# Altium PCB LoRaPIC1.PcbDoc
Units mm, origin at the board's own origin, x right, y up, seen from the top; angles counter-clockwise.
Board outline 57.15 x 38.23 mm, 2 copper layers (Top Layer, Bottom Layer); 22 components, 29 nets, 104 pads, 75 vias.
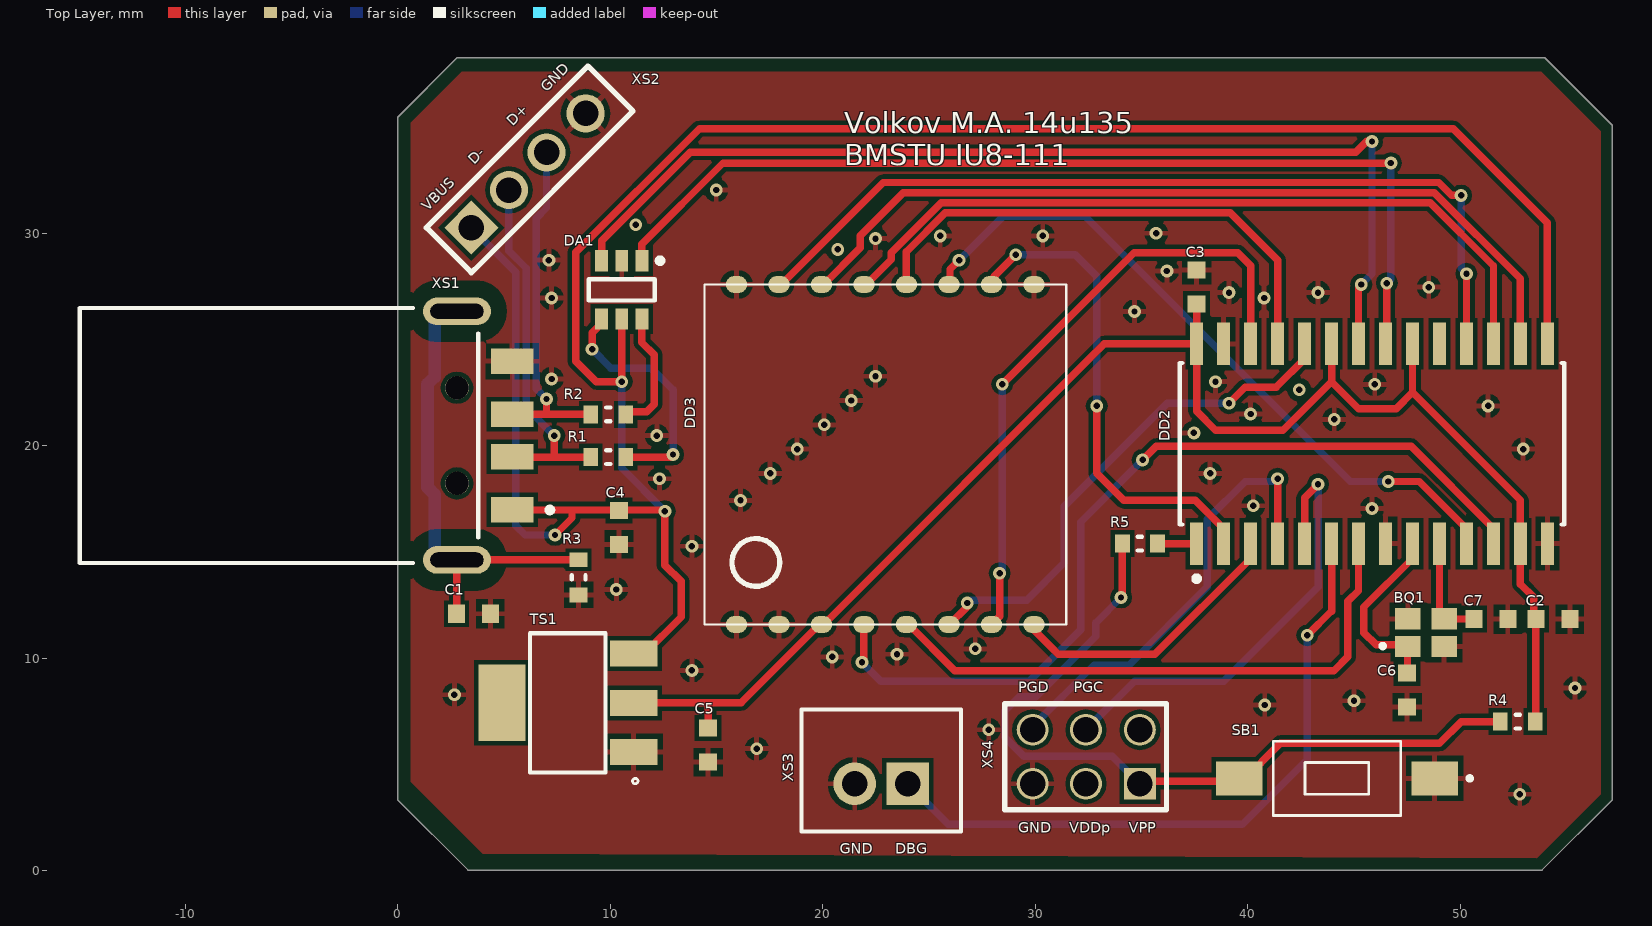
[diagram p0: Top Layer view]
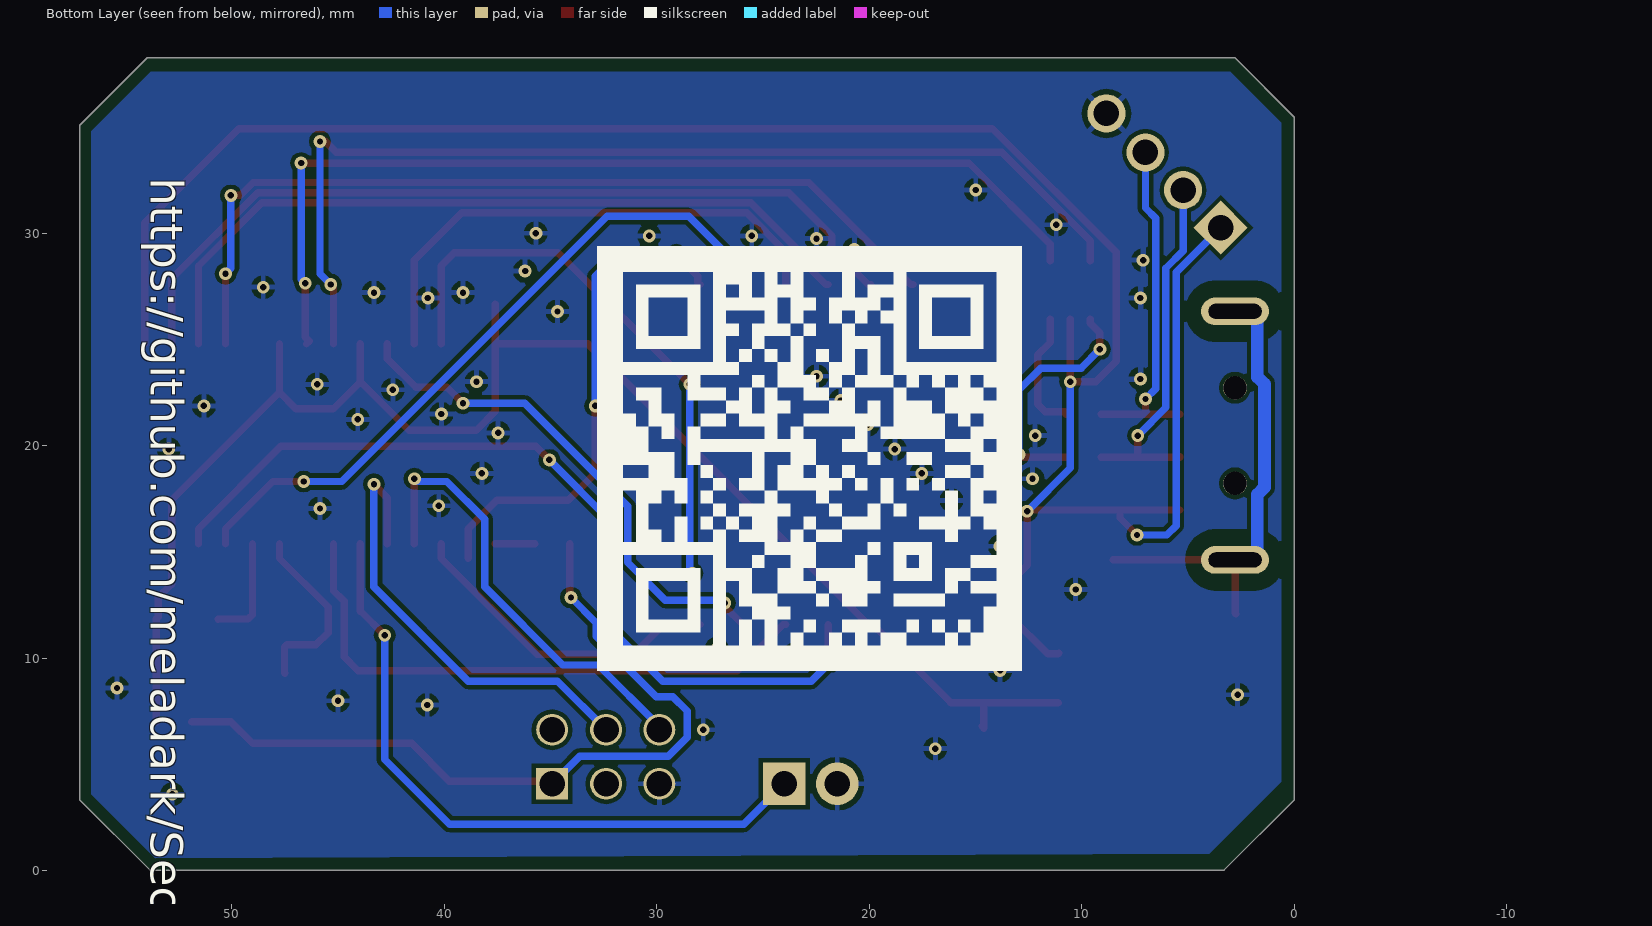
[diagram p1: Bottom Layer view, seen from below]
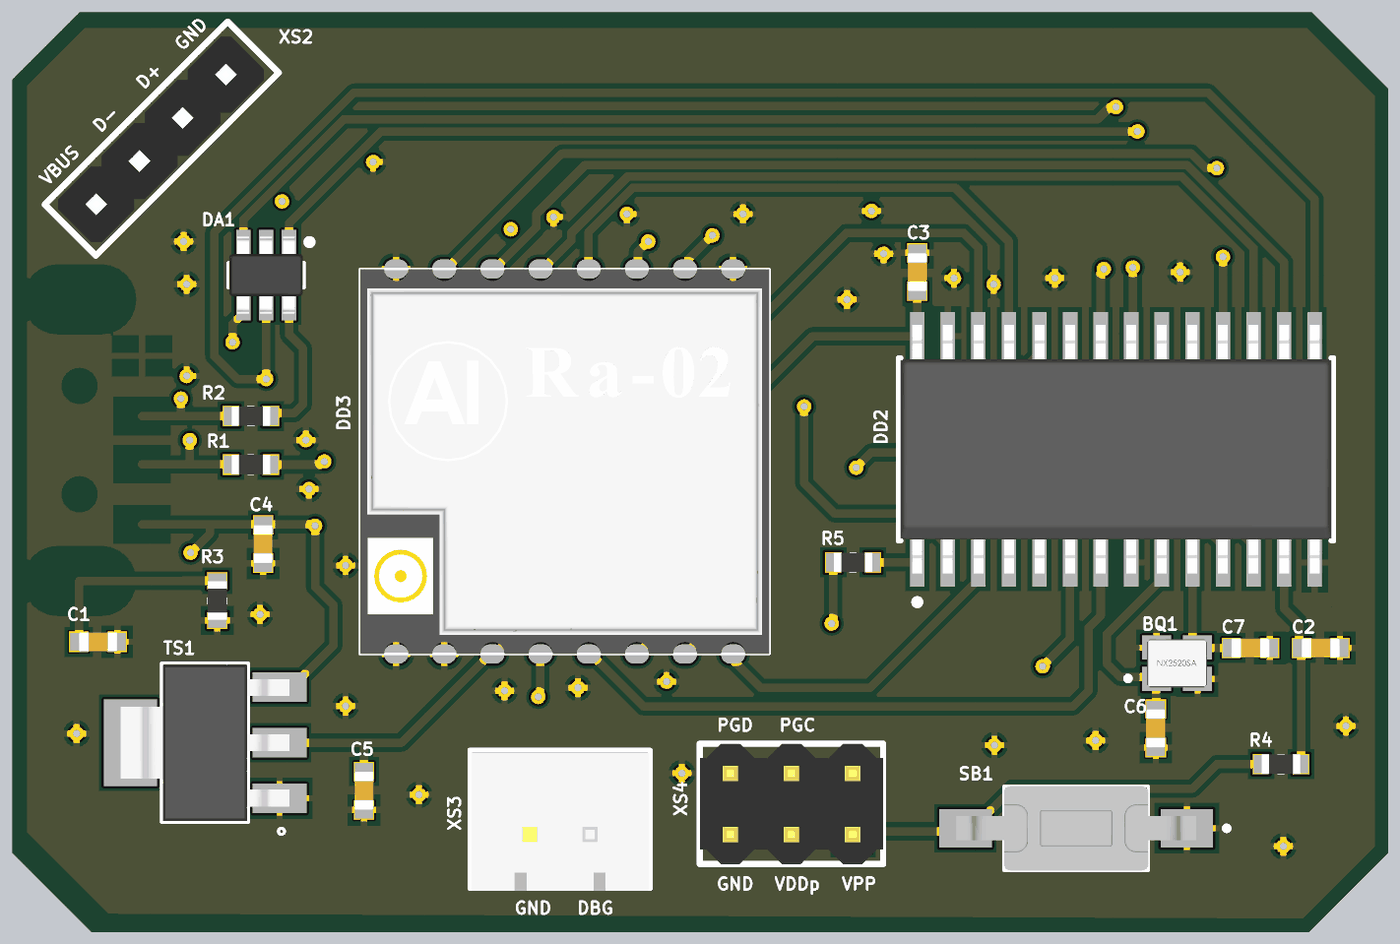
[diagram p2: 3D render of the assembled board from above, using the file's embedded part models]

## Layer stack, top to bottom
Top Solder: solder mask 0.0102, Solder Resist, Dk 3.5
Top Layer: signal copper 0.0356
Dielectric 1: dielectric 0.32, FR-4, Dk 4.8
Bottom Layer: signal copper 0.0356
Bottom Solder: solder mask 0.0102, Solder Resist, Dk 3.5

## Board outline
0,3.332 0,35.463 2.794,38.257 53.975,38.257 57.15,35.082 57.15,3.332 53.848,0.03 3.302,0.03

## Design rules (kind name [scope] priority, off if disabled: settings)
Clearance [All] p1: gap=0.2 ignorepadtopadclearanceinfootprint=FALSE except(0.125: Arc-Arc Arc-Track Arc-SMDPad Arc-THPad Arc-Via Arc-Text Track-Track Track-SMDPad Track-THPad Track-Via Track-Text SMDPad-SMDPad SMDPad-THPad SMDPad-Via SMDPad-Text THPad-THPad THPad-Via THPad-Text Via-Via Via-Text Text-Text; 2: Fill-Text Poly-Text Region-Text)
PolygonConnect [All] p1: connectstyle=Relief reliefconductorwidth=0.254 reliefentries=4 polygonreliefangle="90 Angle" airgapwidth=0.254
RoutingCorners [All] p1: cornerstyle=45-Degree minsetback=3 maxsetback=3
RoutingVias [All] p1: holewidth=0.3 width=0.7 viastyle="Through Hole" minholewidth=0.3 minwidth=0.6 maxholewidth=0.6 maxwidth=1.2
SolderMaskExpansion [All] p1: expansion=0.102
Width [All] p1: maxlimit=10 minlimit=0.125 preferedwidth=0.2
29 further rules are at their usual default settings.

## Components (designator, comment, footprint, x,y, rotation, side; value= is the part's Value field where it differs from the comment)
BQ1 "NX2520SA" *XTAL_NX2520SA-24.000000MHZ-B8 48.387,11.206 r0 top
C1 "GRM1887U1H472JA01D" CAPC1608X09L 3.556,12.095 r180 top value=4.7n
C2 "GRM188R71H104KA93D" CAPC1608X09L 54.356,11.841 r0 top
C3 "GRM188R71H104KA93D" CAPC1608X09L 37.592,27.462 r90 top
C4 "GRM188R71H104KA93D" CAPC1608X09L 10.414,16.159 r270 top
C5 "GRM188R61E106MA73D" CAPC1608X09L 14.605,5.91 r90 top
C6 "GRM1885C1H510JA01D" CAPC1608X09L 47.498,8.501 r270 top
C7 "GRM1885C2A150JA01D" CAPC1608X09L 51.435,11.841 r0 top
DA1 "USBLC6-2SC6" SOT95P280X145-6N 10.541,27.335 r270 top
DD2 "PIC24FJ128GB202-I-SO" Microchip_SO-28_0 45.847,20.096 r90 top
DD3 "RA-02 SX1278" RA-02 14.439,11.589 r90 top
R1 "RC0603FR-0768RL" RESC1608X05N 9.906,19.461 r180 top value=22
R2 "RC0603FR-0768RL" RESC1608X05N 9.906,21.477 r180 top value=22
R3 "RC0603FR-0710KL" RESC1608X05N 8.509,13.81 r270 top value=10МОм
R4 "RC0603FR-0710KL" RESC1608X05N 52.705,7.015 r180 top value=10кОм
R5 "100 ом до 470" RESC1608X05N 34.925,15.397 r180 top value="100 Ом"
SB1 "1437566-3 (FSMSM)" *SW_1437566-4 44.196,4.348 r180 top
TS1 "LD1117S33CTR" *SOT223 8.001,7.904 r180 top
XS1 "Conn_Molex_0480372200_eec" Molex_0480372200_0 -5.588,20.477 r270 top
XS2 "PBS-4" PBS-4 3.464,30.264 r45 top
XS3 "DS1066-02M(MW-2M)" B2B-XH-A 22.753,4.094 r0 top
XS4 "DS1021-2x3S" DS1021-2x3S 36.175,2.864 r90 top

## Footprints (in the part's own frame and the unit in brackets; to place one, negate y for a bottom-side part, rotate by r counter-clockwise, add the part's x,y. Pads: shape width x height; smd on the part's side, far side on the other; paste and mask are expansions set on the pad)
*SOT223 [mil]
  rect 88x48 smd: 1(-122,91) 2(-122,0) 3(-122,-91)
  rect 86.61x141.73 smd: 4(122.01,0)
  silkscreen extent -130,-129 70,150, body extent -138,-128 138,128, height 67
*SW_1437566-4 [mm]
  rect 2.18x1.6 smd: 1(-4.6,0) 2(4.6,0)
  silkscreen extent -6.35,-1.75 3,1.75, body extent -4.98,-1.75 4.98,1.75, height 4.4
*XTAL_NX2520SA-24.000000MHZ-B8 [mm]
  rect 1.2x1 smd: 1(-0.85,-0.65) 2(0.85,-0.65) 3(0.85,0.65) 4(-0.85,0.65)
  silkscreen extent -2.09,-0.68 -1.99,-0.58, body extent -1.25,-1 1.25,1, height 0.65
B2B-XH-A [mm] "2 pin connector"
  rect 2x2 hole 1.2 mask+0.07: 1(1.25,0)
  round 2 hole 1.2 mask+0.07: 2(-1.25,0)
  silkscreen extent -3.75,-2.25 3.75,3.5, body extent -3.7,-2.35 3.7,3.39, height 7.11
CAPC1608X09L [mm] "Chip Capacitor, 2-Leads, Body 1.60x0.80mm, IPC High Density"
  rect 0.8x0.85 smd paste-0.05 mask+0.07: 1(-0.8,0) 2(0.8,0)
  body extent -0.8,-0.4 0.8,0.4, height 0.9
DS1021-2x3S [mm]
  rect 1.5x1.5 hole 1.2: 1(1.23,1.25)
  round 1.5 hole 1.2: 2(1.23,3.79) 3(1.23,6.3) 4(3.77,6.3) 5(3.77,3.79) 6(3.77,1.25)
  silkscreen extent 0,0 5,7.62, body extent 0,0 5,7.62, height 8.4
Microchip_SO-28_0 [mm]
  rect 2x0.6 smd paste+0 mask+0: 1(-4.7,8.255) 2(-4.7,6.985) 3(-4.7,5.715) 4(-4.7,4.445) 5(-4.7,3.175) 6(-4.7,1.905) 7(-4.7,0.635) 8(-4.7,-0.635) 9(-4.7,-1.905) 10(-4.7,-3.175) 11(-4.7,-4.445) 12(-4.7,-5.715) 13(-4.7,-6.985) 14(-4.7,-8.255) 15(4.7,-8.255) 16(4.7,-6.985) 17(4.7,-5.715) 18(4.7,-4.445) 19(4.7,-3.175) 20(4.7,-1.905) 21(4.7,-0.635) 22(4.7,0.635) 23(4.7,1.905) 24(4.7,3.175) 25(4.7,4.445) 26(4.7,5.715) 27(4.7,6.985) 28(4.7,8.255)
  silkscreen extent -6.47,-9.05 3.8,9.05, body extent -5.8,-9.3 5.8,9.3, height 0.25
Molex_0480372200_0 [mm]
  rect 1.2x2 smd paste+0 mask+0: 1(3.5,10.975) 2(1,10.975) 3(-1,10.975) 4(-3.5,10.975)
  oval 1.3x3.2 hole 2.5 slot 0.7 at 0 deg paste-1000 mask+0: 5(-5.85,8.375) 6(5.85,8.375)
  round 1.1 hole 1.1 unplated paste-1000 mask+0: ""(-2.25,8.375) ""(2.25,8.375)
  silkscreen extent -6,-9.38 6,12.88, body extent -6.02,-9.32 6.03,11.63, height 2.11
PBS-4 [mm]
  rect 1.8x1.8 hole 1.2: 1(0,0)
  round 1.8 hole 1.2: 2(2.5,0) 3(5,0) 4(7.6,0)
  silkscreen extent -1.5,-1.5 9.25,1.5, body extent -1.25,-1.27 8.91,1.27, height 8.6
RA-02 [mm]
  oval 0.8x1 smd: 1(0,-1.5) 2(0,-3.5) 3(0,-5.5) 4(0,-7.493) 5(0,-9.5) 6(0,-11.5) 7(0,-13.5) 8(0,-15.5) 9(16,-15.5) 10(16,-13.5) 11(16,-11.5) 12(16,-9.5) 13(16,-7.5) 14(16,-5.5) 15(16,-3.5) 16(16,-1.5)
  silkscreen extent 0,-17.02 16,0, body extent 0,-17.01 16,-0.01, height 3.2
RESC1608X05N [mm] "Chip Resistor, 2-Leads, Body 1.60x0.80mm, IPC Medium Density"
  rect 0.7x0.85 smd paste-0.05: 1(-0.825,0) 2(0.825,0)
  silkscreen extent -0.1,-0.33 0.1,0.33, body extent -0.8,-0.4 0.8,0.4, height 0.45
SOT95P280X145-6N [mm] "SOT23, 6-Leads, Body 2.92x2.80mm, Pitch 0.95mm, IPC Medium Density"
  rect 1x0.6 smd: 1(-1.375,0.95) 2(-1.375,0) 3(-1.375,-0.95) 4(1.375,-0.95) 5(1.375,0) 6(1.375,0.95)
  silkscreen extent -1.5,-1.55 0.5,1.93, body extent -1.6,-1.53 1.6,1.53, height 1.45

## Part data
BQ1: library part NX2520SA-24.000000MHZ-B8, "CRYSTAL 24.0000MHZ 10PF SMD", Package="SMD-4 NDK America, Inc.", Availability=Unavailable, MF="NDK America, Inc.", MP=NX2520SA-24.000000MHZ-B8, Price=None, SnapEDA_Link=https://www.snapeda.com/parts/NX2520SA-24.000000MHZ-B8/NDK%20America%2C%20Inc./view-part/?ref=snap
C1 C2 C3 C4 C5 C6: library part CC1608, "Конденсатор 1.6x0.8 мм", Tolerance=±10%, ComponentLink1Description=buy, ТКЕ=X7R
  C1: ComponentLink1URL=https://www.chipdip.ru/product/grm1887u1h472ja01d, РКД Наименование="CC1608M - NP0 - 16 V - 4.7 nF ±10%"
  C2: ComponentLink1URL=https://www.chipdip.ru/product/grm188r71h104khttps://www.chipdip.ru/product/grm188r71h104k, GRM21BR71C105KA01L=0.1u, РКД Наименование="CC1608M - NP0 - 16 V - 10 nF ±10%"
  C3: ComponentLink1URL=https://www.chipdip.ru/product/grm188r71h104k, GRM21BR71C105KA01L=0.1u, РКД Наименование="CC1608M - NP0 - 16 V - 10 nF ±10%"
  C4: ComponentLink1URL=https://www.chipdip.ru/product/grm188r71h104k, GRM21BR71C105KA01L=100n, РКД Наименование="CC1608M - NP0 - 16 V - 10 nF ±10%"
  C5: ComponentLink1URL=https://www.chipdip.ru/product/grm188r61e106m, GRM21BR71C105KA01L=10u, РКД Наименование="CC1608M - NP0 - 16 V - 10 nF ±10%"
  C6: ComponentLink1URL=https://www.chipdip.ru/product/grm1885c1h510j, GRM21BR71C105KA01L=50p, РКД Наименование="CC1608M - NP0 - 16 V - 10 nF ±10%"
C7: library part CC1608, "Конденсатор 0.8x0.5 мм 50 пикофара", Tolerance=±10%, ComponentLink1Description=buy, ComponentLink1URL=https://www.chipdip.ru/product/grm1885c2a150j, GRM21BR71C105KA01L=15p, РКД Наименование="CC1608M - NP0 - 16 V - 10 nF ±10%", ТКЕ=X7R
DA1: "USB protection IC", Breakdown Voltage=6V, Capacitance=3.5pF, Case/Package=SOT-23, Clamping Voltage=17V, Leakage Current=150nA, Manufacturer=STMicroelectronics, Max Operating Temperature=125°C, Min Operating Temperature=-40°C, Operating Supply Voltage=1.1V, Package Quantity=3000, Peak Pulse Current=5A, Power Line Protection=Yes, Reverse Standoff Voltage=5.25V, Supplier Part Number 1=497-5235-1-ND, Test Current=1mA, Working Voltage=5V, ComponentLink1Description=http://www.farnell.com/datasheets/1690354.pdf, ComponentLink1URL=http://www.farnell.com/datasheets/1690354.pdf, ComponentLink2Description=http://www.st.com/content/ccc/resource/technical/document/datasheet/06/1d/48/9c/6c/20/4a/b2/CD00050750.pdf/files/CD00050750.pdf/jcr:content/translations/en.CD00050750.pdf, ComponentLink2URL=http://www.st.com/content/ccc/resource/technical/document/datasheet/06/1d/48/9c/6c/20/4a/b2/CD00050750.pdf/files/CD00050750.pdf/jcr:content/translations/en.CD00050750.pdf, ComponentLink3Description=http://www.st.com/web/en/resource/technical/document/datasheet/CD00050750.pdf, ComponentLink3URL=http://www.st.com/web/en/resource/technical/document/datasheet/CD00050750.pdf, ComponentLink4Description=http://datasheet.iiic.cc/stmicroelectronics/USBLC6-2SC6.pdf, ComponentLink4URL=http://datasheet.iiic.cc/stmicroelectronics/USBLC6-2SC6.pdf, ComponentLink5Description=http://www.produktinfo.conrad.com/datenblaetter/1100000-1199999/001184109-da-01-en-IC_ESD_PROTECTI_USBLC6_2SC6_SOT_23_6_STM.pdf, ComponentLink5URL=http://www.produktinfo.conrad.com/datenblaetter/1100000-1199999/001184109-da-01-en-IC_ESD_PROTECTI_USBLC6_2SC6_SOT_23_6_STM.pdf, Contact Plating=Matte,Tin, Data Rate=480Mbps, Depth=1.75mm, Direction=Bidirectional,Unidirectional, Element Configuration=Dual, ESD Protection=Yes, Height=1.3mm, Lead Free="Lead Free", Length=3.05mm, Manufacturer Part Number=USBLC6-2SC6, Max Breakdown Voltage=6V, Max Reverse Leakage Current=150nA, Min Breakdown Voltage=6V, Mount="Surface Mount", Number of Bidirectional Channels=2, Number of Channels=2, Number of Elements=1, Number of Pins=6, Packaging="Tape and Reel", PartNo=USBLC6-2SC6, Polarity=Bidirectional,Unidirectional, Pricing 1="1=0.49, 10=0.419, 100=0.3131, 500=0.24602, 1000=0.1901 (USD)", Radiation Hardening=No, REACH SVHC="No SVHC", Reverse Breakdown Voltage=6V, Stock 1=165611, Supplier 1=Digi-Key, Termination=SMD/SMT, Width=1.75mm
DD3: library part RA-02
R1 R2: library part R1608, "Резистор 1.6x0.8 мм", Tolerance=±1%, ComponentLink1Description=buy, ComponentLink1URL=https://www.chipdip.ru/product0/9000079612, РКД Наименование="RC1608M - 22 Ohm ±1%"
R3 R4 R5: library part R1608, "Резистор 1.6x0.8 мм", Tolerance=±5%, РКД Наименование="RC1608M - 100 Ohm ±5%"
  R3 R4: ComponentLink1Description=https://www.chipdip.ru/product0/9000079736, ComponentLink1URL=https://www.chipdip.ru/product0/9000079736
  R5: ComponentLink1Description=https://www.chipdip.ru/product0/9000079616, ComponentLink1URL=https://www.chipdip.ru/product0/9000079616
SB1: library part FSMSM, "1437566-3 (FSMSM), Кнопка тактовая h=4.6 мм SMD SPST Switch Tactile / Switch Tactile OFF (ON) SPST Rectangular Button Gull Wing 0.05A 24VDC SMD Loose", ComponentLink1Description=buy, ComponentLink1URL=https://www.chipdip.ru/product/tyco-1437566-3-fsmsm, ComponentLink2Description=datasheet, ComponentLink2URL=https://static.chipdip.ru/lib/071/DOC000071159.pdf, Артикул="1437566-3 (FSMSM)", Произвдитель="TE Connectivity"
TS1: "Linear Regulator / LDO Regulator Pos 3.3V 1.3A 4-Pin(3+Tab) SOT-223 T/R", Code_IPC=SOT-223, ComponentLink1Description=buy, ComponentLink1URL=https://www.chipdip.ru/product/ld1117s33ctr-2, ComponentLink2Description=datasheet, ComponentLink2URL=https://static.chipdip.ru/lib/292/DOC000292513.pdf, DatasheetVersion="revB, Feb-2007", PackageDescription="3-Lead Plastic Small Outline Transistor (TT) [SOT-23]", PackageReference=SOT-223, PackageVersion="revBB, Aug-2009", PartNumber=LD1117S33CTR
XS1: "CONN PLUG USB A 4POS SMD R/A", Current - Maximum per Contact=1.5A, Digikey Part Number=WM3983CT-ND, Manufacturer=Molex, Mouser Part Number=538-48037-2200, Package=CONN_USB_12MM0_18MM75, Part Number=0480372200, Temperature="-20°C to +85°C", Temperature Range High=+85°C, Temperature Range Low=-20°C, Voltage - Maximum="150V AC (RMS)", ComponentLink1Description=Upverter, ComponentLink1URL=https://upverter.com/upn/revision/6bade1e906f93a88/, ComponentLink2Description=Datasheet, ComponentLink2URL=http://www.molex.com/pdm_docs/sd/480372200_sd.pdf, Digikey Description="CONN PLUG USB A 4POS SMD R/A", helpURL=https://upverter.com/upn/revision/6bade1e906f93a88/, Is Female=yes, Lead Free=yes, Price=0.972849437621, RoHS=TRUE, Supplier 1=Digi-Key, Supplier 2=Mouser, Supplier Part Number 1=WM3983CT-ND, Supplier Part Number 2=538-48037-2200
XS2: "2.54mm", ComponentLink1Description=3d, ComponentLink1URL=https://www.3dcontentcentral.com/secure/download-model.aspx?catalogid=171&id=455493, ComponentLink2Description=https://www.chipdip.ru/product/pld-6, ComponentLink2URL=https://www.chipdip.ru/product/pld-6
XS3: library part B2B-XH-A, "Разъем 2", Colour=Natural, Contact Resistance=20mR, Current Rating=3A, Housing Colour=White, Insulation Resistance=1GR, Manufacturer=JST, Manufacturer Part Number=B2B-XH-A(LF)(SN), Max Operating Temperature=85°C, Max Voltage Rating (AC)=250V, Min Operating Temperature=-25°C, Supplier Part Number 1=455-2247-ND, Connector Type="Male Pin", Contact Material=Brass, Contact Plating=Copper,Lead,Tin, Depth=5.75mm, Fastening Type=Detent, Housing Material=Polyamide, Lead Free="Lead Free", Lead Pitch=2.5mm, Length=7.4mm, Max Current Rating=3A, Max Voltage Rating (DC)=250V, Mount="Through Hole", Number of Contacts=2, Number of Positions=2, Number of Rows=1, Orientation=Straight, Packaging=Bulk, Pitch=2.5mm, Pricing 1="1=0.15, 10=0.141, 100=0.0868, 500=0.07182, 1000=0.06284, 5000=0.05387, 10000=0.05237 (USD)", REACH SVHC="No SVHC", Stock 1=494280, Supplier 1=Digi-Key, Termination=Solder, Voltage Rating=250V, Voltage Rating (AC)=250V, Wire/Cable Gauge=22AWG
XS4: library part PLD3X2, ComponentLink1Description=Datasheet, ComponentLink1URL=https://static.chipdip.ru/lib/227/DOC000227157.pdf, ComponentLink2Description=footprint, ComponentLink2URL=https://www.3dcontentcentral.com/secure/download-model.aspx?catalogid=171&id=227431

## Via types
v1: diameter 0.6, hole 0.3, Top Layer to Bottom Layer, 75 vias

## Nets (pads, with @x,y where several pads share a name; then routed paths per layer and width w, separated by ;. In a path a pad name is that pad's centre, name@x,y a point inside that pad or via, vN(x,y) a via of type N, cw(c..) or ccw(c..) an arc to the next point about the centre after c; other vN are vias at no path point)
D+: DA1.1 DD2.21 | length 46.3
  Top Layer w0.35: DA1.1 11.491,29.491 15.304,33.304 v1(46.736,33.304) ; DD2.21 46.355,24.923 46.545,25.114 v1(46.545,27.652)
  Bottom Layer w0.35: v1(46.545,27.652) 46.736,27.843 v1(46.736,33.304)
D-: DA1.3 DD2.22 | length 48.9
  Top Layer w0.35: DA1.3 9.591,29.64 13.763,33.812 45.085,33.812 45.593,34.32 v1(45.847,34.32) ; DD2.22 45.212,27.462 v1(45.339,27.589)
  Bottom Layer w0.35: v1(45.339,27.589) 45.847,28.097 v1(45.847,34.32)
DIO3: DD2.3 DD3.8 | length 13.5
  Top Layer w0.35: DD3.8 29.985,11.589 29.985,11.291 31.085,10.19 35.626,10.19 40.132,14.696 DD2.3
DIO4: DD2.2 DD3.10 | length 23.8
  Top Layer w0.35: DD3.10 27.985,27.589 28.077,27.681 28.077,27.98 v1(29.083,28.986) ; v1(32.893,21.874) 32.893,18.699 34.163,17.429 37.529,17.429 38.862,16.096 DD2.2 DD2.2@38.862,14.696
  Bottom Layer w0.35: v1(29.083,28.986) 31.877,28.986 32.893,27.97 v1(32.893,21.874)
DIO5: DD2.11 DD3.11 | length 32.9
  Top Layer w0.35: DD3.11 25.987,27.637 25.987,28.303 v1(26.416,28.732) ; v1(46.609,18.318) 48.07,18.318 50.292,16.096 DD2.11
  Bottom Layer w0.35: v1(26.416,28.732) 28.492,30.808 32.341,30.808 44.831,18.318 v1(46.609,18.318)
DM: R1.2 XS1.2 XS2.2 | length 17.2
  Top Layer w0.35: XS1.2 5.395,19.469 7.4,19.469 ; v1(7.366,20.477) 7.366,19.503 7.4,19.469 ; R1.2 9.081,19.469 7.4,19.469
  Bottom Layer w0.35: XS2.2 5.232,29.168 6.037,28.364 6.037,21.806 v1(7.366,20.477)
DP: R2.2 XS1.3 XS2.3 | length 16.4
  Top Layer w0.35: XS1.3 7,21.477 ; v1(7,22.2) 7,21.477 ; R2.2 7,21.477
  Bottom Layer w0.35: v1(7,22.2) 6.512,22.688 6.512,30.702 7,31.19 XS2.3
GND: BQ1.2 BQ1.4 C1.1 C2.2 C3.2 C4.2 C5.1 C6.2 C7.2 DA1.2 DD2.8 DD2.14 DD2.27 DD3.1 DD3.2 DD3.9 DD3.16 R3.2 SB1.1 TS1.1 XS1.4 XS2.4 XS3.2 XS4.3
  other v1: 52.8,3.6 16.891,5.745 27.813,6.634 40.8,7.8 45,8 2.667,8.285 55.4,8.6 13.843,9.428 20.447,10.063 23.495,10.19 27.178,10.444 10.287,13.238 13.843,15.27 45.847,17.048 40.259,17.175 16.129,17.429 12.319,18.445 17.526,18.699 38.227,18.699 18.796,19.842 52.959,19.842 12.192,20.477 37.465,20.604 20.066,20.985 44.069,21.239 40.132,21.493 51.308,21.874 21.336,22.128 42.418,22.636 45.974,22.89 38.481,23.017 7.239,23.144 22.479,23.271 34.671,26.319 7.239,26.954 40.767,26.954 39.116,27.208 43.307,27.208 48.514,27.462 36.195,28.224 7.112,28.732 20.701,29.24 22.479,29.748 25.527,29.875 30.353,29.875 35.687,30.002 11.2,30.4 14.986,32.034
MCLR: DD2.1 R5.1 | length 1.8
  Top Layer w0.35: R5.1 DD2.1
NetBQ1_1: BQ1.1 C6.1 DD2.9 | length 8.7
  Top Layer w0.35: C6.1 47.517,9.32 47.517,10.536 47.419,10.635 46.037,10.635 45.466,11.206 45.466,12.41 47.752,14.696 DD2.9
NetBQ1_3: BQ1.3 C7.1 DD2.10 | length 5
  Top Layer w0.35: DD2.10 49.022,12.056 49.222,11.856 BQ1.3 49.245,11.849 50.627,11.849 C7.1
NetC1_2: C1.2 R3.1 XS1.5 XS1.6 | length 22
  Top Layer w0.35: C1.2 2.772,12.111 2.772,14.611 XS1.6 R3.1
  Bottom Layer w0.6: XS1.6 2.06,14.627 1.737,14.95 1.737,17.714 1.4,18.051 1.4,22.903 1.737,23.24 1.737,26.004 2.06,26.327 XS1.5
NetDD2_7: DD2.7 DD3.5 | length 27.5
  Top Layer w0.35: DD3.5 24.039,11.589 26.213,9.415 44.056,9.415 44.704,10.063 44.704,12.673 45.212,13.181 DD2.7
NetDD2_16: DD2.16 DD3.14 | length 39.8
  Top Layer w0.35: DD3.14 20.039,27.589 21.771,29.321 21.771,29.889 23.794,31.912 48.782,31.912 52.832,27.862 DD2.16
NetDD2_17: DD2.17 DD3.13 | length 36.3
  Top Layer w0.35: DD3.13 22.039,27.589 23.214,28.764 23.214,29.082 25.569,31.437 48.586,31.437 51.562,28.46 DD2.17
NetDD2_18: DD2.18 DD3.15 | length 41.4
  Top Layer w0.35: DD3.15 18.039,27.589 22.837,32.387 48.979,32.387 49.586,31.78 v1(50.038,31.78) ; DD2.18 v1(50.292,28.097)
  Bottom Layer w0.35: v1(50.038,31.78) 50.038,28.351 v1(50.292,28.097)
NetDD2_24: DD2.24 DD3.6 | length 24.3
  Top Layer w0.35: DD3.6 25.958,11.589 26.797,12.428 v1(26.797,12.603) ; v1(39.116,22.001) 39.878,22.763 41.339,22.763 42.672,24.096 DD2.24
  Bottom Layer w0.35: v1(26.797,12.603) 26.924,12.73 29.591,12.73 31.369,14.508 31.369,17.15 36.22,22.001 v1(39.116,22.001)
NetDD2_25: DD2.25 DD3.12 | length 24.6
  Top Layer w0.35: DD3.12 23.939,29.136 25.765,30.962 39.172,30.962 41.402,28.732 DD2.25
NetDD2_26: DD2.26 DD3.7 | length 29.7
  Top Layer w0.35: DD3.7 27.985,11.589 28.077,11.681 28.077,11.727 28.321,11.971 v1(28.321,14) ; v1(28.448,22.89) 34.645,29.087 39.523,29.087 40.132,28.478 DD2.26
  Bottom Layer w0.35: v1(28.321,14) 28.448,14.127 v1(28.448,22.89)
PGC: DD2.5 XS4.5 | length 21.6
  Top Layer w0.35: DD2.5 42.672,17.556 v1(43.307,18.191)
  Bottom Layer w0.35: XS4.5 34.671,8.92 38.862,8.92 43.307,13.365 v1(43.307,18.191)
PGD: DD2.4 XS4.4 | length 21.4
  Top Layer w0.35: DD2.4 v1(41.402,18.445)
  Bottom Layer w0.35: XS4.4 29.875,6.791 32.766,9.682 34.417,9.682 38.1,13.365 38.1,16.54 39.877,18.317 41.274,18.317 v1(41.402,18.445)
RESET_LoRa: DD2.12 DD3.4 | length 41.8
  Top Layer w0.35: v1(21.844,9.809) 21.932,9.897 DD3.4 ; v1(35.052,19.334) 35.687,19.969 47.689,19.969 51.562,16.096 DD2.12
  Bottom Layer w0.35: v1(21.844,9.809) 22.733,8.92 29.718,8.92 32.131,11.333 32.131,16.413 v1(35.052,19.334)
TX: DD2.6 XS3.1 | length 31.5
  Top Layer w0.35: v1(42.799,11.079) 43.942,12.222 DD2.6
  Bottom Layer w0.35: XS3.1 25.908,2.189 39.751,2.189 42.799,5.237 v1(42.799,11.079)
USB1_N: DA1.4 R1.1 | length 11.5
  Top Layer w0.35: v1(9.144,24.541) 9.144,25.313 9.591,25.76 DA1.4 ; R1.1 12.827,19.461 v1(12.954,19.588)
  Bottom Layer w0.35: v1(9.144,24.541) 10.033,23.652 11.938,23.652 12.954,22.636 v1(12.954,19.588)
USB1_P: DA1.6 R2.1 | length 5.8
  Top Layer w0.35: R2.1 10.731,21.552 10.781,21.602 11.714,21.602 12.065,21.953 12.065,24.287 11.491,24.861 DA1.6
V3.3: C2.1 C3.1 C5.2 DD2.13 DD2.20 DD2.23 DD2.28 DD3.3 R4.1 TS1.2 | length 74.1
  Top Layer w0.35: TS1.2 14.605,7.904 ; C5.2@14.694,6.799 C5.2 14.605,7.904 ; C3.1 DD2.28 ; DD2.23 43.942,23.017 ; DD2.20 47.752,22.509 ; R4.1 53.543,7.028 53.543,11.854 53.456,11.941 53.456,12.868 52.832,13.492 DD2.13 52.832,17.429 47.752,22.509 ; 14.605,7.904 16.154,7.904 19.839,11.589 DD3.3 20.039,11.589 33.246,24.796 DD2.28 ; DD2.28 37.592,21.62 38.481,20.731 41.656,20.731 43.942,23.017 ; 43.942,23.017 45.212,21.747 46.99,21.747 47.752,22.509
VBUS: C4.1 DA1.5 DD2.15 TS1.3 XS1.1 XS2.1 | length 107.1
  Top Layer w0.35: XS1.1 8.2,16.977 ; v1(7.4,15.8) 8.2,16.6 8.2,16.977 ; DA1.5 v1(10.541,23.017) 9.341,23.017 8.382,23.976 8.382,29.102 14.2,34.92 49.667,34.92 54.102,30.485 DD2.15 ; TS1.3@11.087,10.228 TS1.3 11.608,10.215 13.335,11.943 13.335,13.619 12.573,14.381 v1(12.573,16.921) 12.517,16.977 8.2,16.977
  Bottom Layer w0.35: XS2.1 4.757,28.972 5.562,28.167 5.562,16.243 6.005,15.8 v1(7.4,15.8) ; v1(10.541,23.017) 10.541,18.953 v1(12.573,16.921)
VDD_prog: XS4.2
VPP: R4.2 R5.2 SB1.2 XS4.1 | length 37.3
  Top Layer w0.35: v1(34.036,12.857) 34.1,12.921 R5.2 ; XS4.1 35.052,4.221 39.759,4.221 41.537,5.999 49.022,5.999 50.038,7.015 R4.2
  Bottom Layer w0.35: v1(34.036,12.857) 32.856,11.677 32.856,11.033 30.018,8.195 29.247,8.195 28.57,7.518 28.57,6.278 29.455,5.393 33.626,5.393 XS4.1
pads on no net: DD2.19 TS1.4 XS1. XS4.6

## Polygon pours and split planes (outlines as drawn)
no net on Top Overlay (solid): 3.81,0.665
GND on Top Layer "GND" (solid, pour order 24): 4,0.8 0.6,4.2 0.6,35.2 3,37.6 53.8,37.6 56.6,34.8 56.6,3.6 53.6,0.6
GND on Top Layer "GND" (solid, pour order 12): 2.54,3.459
GND on Bottom Layer "GND" (solid, pour order 26): 4,0.8 0.6,4.2 0.6,35.2 3,37.6 53.8,37.6 56.6,34.8 56.6,3.6 53.6,0.6

## Silkscreen, mask and mechanical layers (free items; w line width, h text height)
Top Overlay:
  text "GND" at 7,36.6 h0.5 r45
  text "D+" at 5.4,35 h0.5 r45
  text "D-" at 3.6,33.2 h0.5 r45
  text "Volkov M.A. 14u135 / BMSTU IU8-111" at 21,33.2 h1
  text "VBUS" at 1.4,31 h0.5 r45
  text "PGD" at 29.2,8.4 h0.5
  text "PGC" at 31.8,8.4 h0.5
  text "GND" at 29.2,1.8 h0.5
  text "VDDp" at 31.6,1.8 h0.5
  text "VPP" at 34.4,1.8 h0.5
  text "GND" at 20.8,0.8 h0.5
  text "DBG" at 23.4,0.8 h0.5
Bottom Overlay:
  drawing of 255 lines, arcs and shapes, not listed
  text "https://github.com/meladark/SecLoRaATM" at 53.8,32.6 h1.52 r90
Mechanical 13:
  the board outline again, w0.254
Drill Drawing:
  circle w0.254: c-137.627,83.97 r0.847
  lines w0.254: -138.474,71.693 -137.627,72.116 -136.78,71.693 -137.204,72.54 -136.78,73.386 -137.627,72.963 -138.474,73.386 -138.05,72.54 -138.474,71.693 ; -138.474,77.196 -136.78,77.196 -137.627,75.503 -138.474,77.196 ; -138.474,79.313 -136.78,79.313 -136.78,81.006 -138.474,81.006 -138.474,79.313
  lines w0.381: -139.992,70.55 236.125,70.55 ; -139.992,85.79 236.125,85.79 ; -126,66.74 -126,89.6 ; -112.542,66.74 -112.542,89.6 ; -84.102,66.74 -84.102,89.6 ; -71.253,66.74 -71.253,89.6 ; -52.614,66.74 -52.614,89.6 ; -14.525,66.74 -14.525,89.6 ; 0.457,66.74 0.457,89.6 ; 19.4,66.74 19.4,89.6 ; 82.626,66.74 82.626,89.6 ; 104.312,66.74 104.312,89.6 ; 138.186,66.74 138.186,89.6 ; 172.059,66.74 172.059,89.6 ; 200.499,66.74 200.499,89.6 ; -139.992,66.74 236.125,66.74 236.125,89.6 -139.992,89.6 -139.992,66.74
  text "Symbol" at -137.706,86.933 h1.83
  text "Count" at -124.857,86.933 h1.83
  text "Hole Size" at -111.399,86.933 h1.83
  text "Plated" at -82.959,86.933 h1.83
  text "Hole Type" at -70.11,86.933 h1.83
  text "Drill Layer Pair" at -51.471,86.933 h1.83
  text "Via/Pad" at -13.382,86.933 h1.83
  text "Pad Shape" at 1.6,86.933 h1.83
  text "Template" at 20.543,86.933 h1.83
  text "Description" at 83.769,86.933 h1.83
  text "Hole Tolerance (+)" at 105.455,86.933 h1.83
  text "Hole Tolerance (-)" at 139.329,86.933 h1.83
  text "Hole Length" at 173.202,86.933 h1.83
  text "Routed Path Length" at 201.642,86.933 h1.83
  text "2" at -124.857,83.123 h1.52
  text "43,31mil (1,100mm)" at -111.399,83.123 h1.52
  text "NPTH" at -82.959,83.123 h1.52
  text "Round" at -70.11,83.123 h1.52
  text "Top Layer - Bottom Layer" at -51.471,83.123 h1.52
  text "Pad" at -13.382,83.123 h1.52
  text "Rounded" at 1.6,83.123 h1.52
  text "c110hn110m110p100110" at 20.543,83.123 h1.52
  text "-" at 173.202,83.123 h1.52
  text "-" at 201.642,83.123 h1.52
  text "2" at -124.857,79.313 h1.52
  text "98,43mil (2,500mm)" at -111.399,79.313 h1.52
  text "PTH" at -82.959,79.313 h1.52
  text "Slot" at -70.11,79.313 h1.52
  text "Top Layer - Bottom Layer" at -51.471,79.313 h1.52
  text "Pad" at -13.382,79.313 h1.52
  text "Rounded" at 1.6,79.313 h1.52
  text "r130_320h250_70r100m130_320p100130_100320" at 20.543,79.313 h1.52
  text "27,56mil (0,700mm)" at 173.202,79.313 h1.52
  text "-70,87mil (-1,800mm)" at 201.642,79.313 h1.52
  text "12" at -124.857,75.503 h1.52
  text "47,24mil (1,200mm)" at -111.399,75.503 h1.52
  text "PTH" at -82.959,75.503 h1.52
  text "Round" at -70.11,75.503 h1.52
  text "Top Layer - Bottom Layer" at -51.471,75.503 h1.52
  text "Pad" at -13.382,75.503 h1.52
  text "(Mixed)" at 1.6,75.503 h1.52
  text "(Mixed)" at 20.543,75.503 h1.52
  text "-" at 173.202,75.503 h1.52
  text "-" at 201.642,75.503 h1.52
  text "75" at -124.857,71.693 h1.52
  text "11,81mil (0,300mm)" at -111.399,71.693 h1.52
  text "PTH" at -82.959,71.693 h1.52
  text "Round" at -70.11,71.693 h1.52
  text "Top Layer - Bottom Layer" at -51.471,71.693 h1.52
  text "Via" at -13.382,71.693 h1.52
  text "Rounded" at 1.6,71.693 h1.52
  text "v60h30" at 20.543,71.693 h1.52
  text "-" at 173.202,71.693 h1.52
  text "-" at 201.642,71.693 h1.52
  text "91 Total" at -124.857,67.883 h1.52
  text "Slot definitions :" at -137.706,64.201 h1.52
  text "Routed Path Length" at -111.476,64.201 h1.52
  text "= Calculated from tool start centre position to tool end centre position." at -83.468,64.201 h1.52
  text "Hole Length" at -111.476,61.661 h1.52
  text "= Routed Path Length + Tool Size = Slot length as defined in the PCB layout" at -93.879,61.661 h1.52